# Altium PCB LXF1768.PcbDoc (part 4 of 5)
Units mil, origin at the board's own origin, x right, y up, seen from the top; angles counter-clockwise.
Board outline 3899 x 3079 mil, 2 copper layers (Top Layer, Bottom Layer); 52 components, 108 nets, 388 pads, 52 vias.
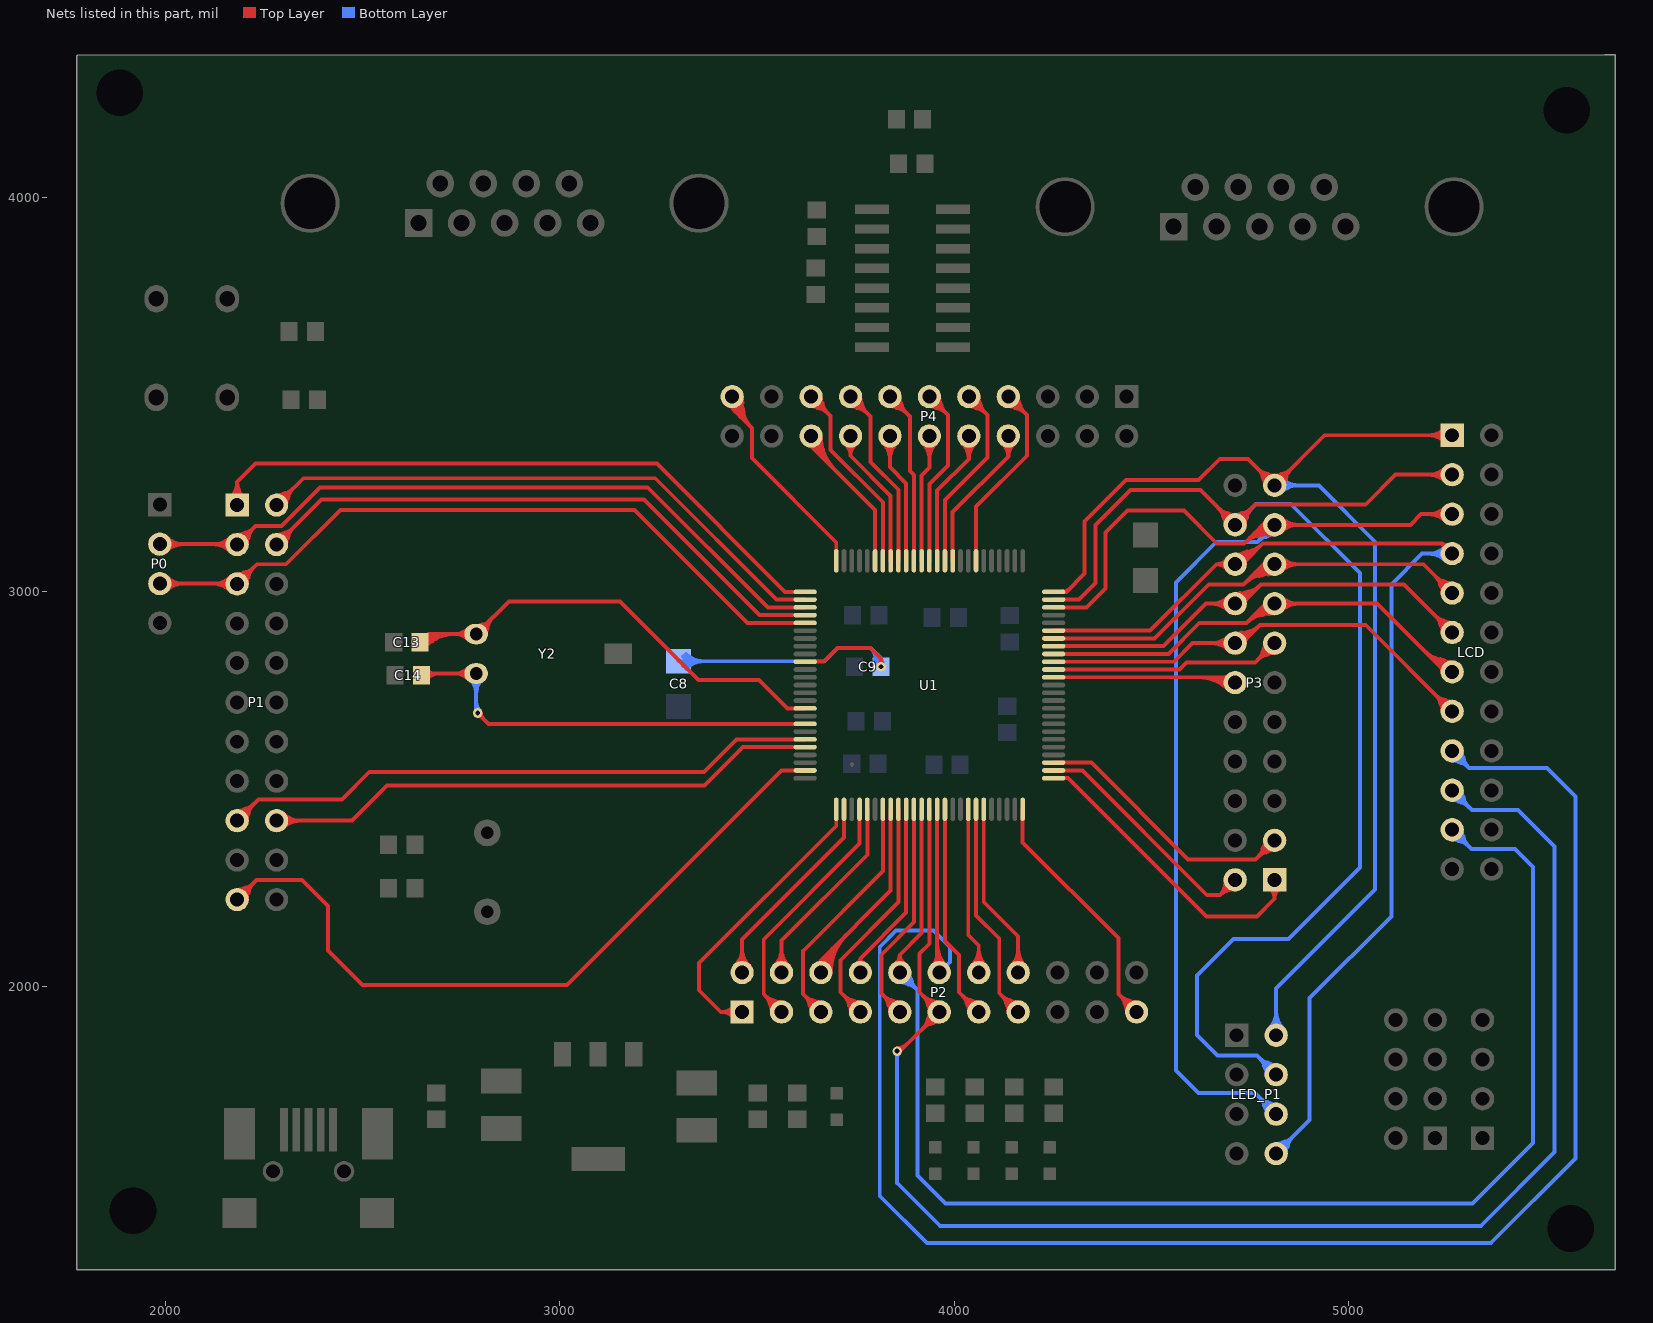
[diagram p4: the nets of this part, all layers, seen from the top]

## Via types
v1: diameter 25, hole 12, Top Layer to Bottom Layer, 27 vias
v2: diameter 24, hole 12, Top Layer to Bottom Layer, 25 vias

## Nets (pads, with @x,y where several pads share a name; then routed paths per layer and width w, separated by ;. In a path a pad name is that pad's centre, name@x,y a point inside that pad or via, vN(x,y) a via of type N, cw(c..) or ccw(c..) an arc to the next point about the centre after c; other vN are vias at no path point) (continued)
P0_28: P1.21 U1.24 | length 2243.4
  Top Layer w10: P1.21@2176.64,2221.1 cw(c2214.3,2213.39) 2204.35,2250.52 ; P1.21@2182,2220 2231,2269 2347,2269 2412,2204 2412,2091 2500,2003 3018,2003 3562.24,2547.24 U1.24@3622,2547.24 ; P1.21@2183.1,2214.64 ccw(c2175.39,2252.3) 2212.52,2242.35 ; 2206.8,2244.8 cw(c2182,2269.6) 2182,2234.53 ccw(c2182,2269.6) 2206.8,2244.8 ; 2206.8,2244.8 ccw(c2231.6,2220) 2196.53,2220 cw(c2231.6,2220) 2206.8,2244.8 ; 2223.87,2261.87 cw(c2182,2303.74) 2182,2244.53 ccw(c2182,2303.74) 2223.87,2261.87 ; 2223.87,2261.87 ccw(c2265.74,2220) 2206.53,2220 cw(c2265.74,2220) 2223.87,2261.87
P0_29: P2.3 U1.29 | length 1014.3
  Top Layer w10: 3531.48,1957.35 ccw(c3568.61,1967.3) P2.3@3560.9,1929.64 ; 3539.65,1965.52 cw(c3529.7,1928.39) P2.3@3567.36,1936.1 ; P2.3@3562,1935 3517,1980 3517,2119 3759.8,2361.8 U1.29@3759.8,2448.82 ; 3520.13,1976.87 cw(c3478.26,1935) 3537.47,1935 ccw(c3478.26,1935) 3520.13,1976.87 ; 3520.13,1976.87 ccw(c3562,2018.74) 3562,1959.53 cw(c3562,2018.74) 3520.13,1976.87 ; 3537.2,1959.8 cw(c3512.4,1935) 3547.47,1935 ccw(c3512.4,1935) 3537.2,1959.8 ; 3537.2,1959.8 ccw(c3562,1984.6) 3562,1949.53 cw(c3562,1984.6) 3537.2,1959.8
P0_30: P2.4 U1.30 | length 800.1
  Top Layer w10: P2.4@3562,2035 3562,2116 3779.48,2333.48 U1.30@3779.48,2448.82 ; 3562,2070.07 cw(c3526.93,2070.07) 3551.73,2045.27 ccw(c3526.93,2070.07) 3562,2070.07 ; 3562,2070.07 ccw(c3597.07,2070.07) 3572.27,2045.27 cw(c3597.07,2070.07) 3562,2070.07 ; 3562,2094.21 cw(c3502.79,2094.21) 3544.66,2052.34 ccw(c3502.79,2094.21) 3562,2094.21 ; 3562,2094.21 ccw(c3621.21,2094.21) 3579.34,2052.34 cw(c3621.21,2094.21) 3562,2094.21
P1_0: P4.18 U1.95 | length 1020
  Top Layer w10: P4.18@3631.54,3381.54 cw(c3609.98,3328.37) 3665.4,3343.22 ; P4.18@3634.4,3380.71 cw(c3631.08,3362.51) 3648.95,3367.3 ; P4.18@3635.3,3390.8 cw(c3619.44,3351.7) 3660.2,3362.62 ; P4.18@3637,3395 3637,3370 3799.16,3207.84 U1.95@3799.16,3078.74 ; P4.18@3631.53,3395 ccw(c3678.67,3395) 3645.34,3361.66 cw(c3678.67,3395) P4.18@3631.53,3395 ; P4.18@3641.53,3395 ccw(c3712.81,3395) 3662.41,3344.59 cw(c3712.81,3395) P4.18@3641.53,3395 ; P4.18@3651.53,3395 ccw(c3746.96,3395) 3679.48,3327.52 cw(c3746.96,3395) P4.18@3651.53,3395 ; P4.18@3661.53,3395 ccw(c3781.1,3395) 3696.55,3310.45 cw(c3781.1,3395) P4.18@3661.53,3395
P1_1: P4.17 U1.94 | length 872.9
  Top Layer w10: P4.17@3631.64,3493.9 ccw(c3669.3,3501.61) 3659.35,3464.48 ; P4.17@3637,3495 3686,3446 3686,3360 3818.85,3227.15 U1.94@3818.85,3078.74 ; P4.17@3638.1,3500.36 cw(c3630.39,3462.7) 3667.52,3472.65 ; 3661.8,3470.2 cw(c3686.6,3495) 3651.53,3495 ccw(c3686.6,3495) 3661.8,3470.2 ; 3661.8,3470.2 ccw(c3637,3445.4) 3637,3480.47 cw(c3637,3445.4) 3661.8,3470.2 ; 3678.87,3453.13 cw(c3720.74,3495) 3661.53,3495 ccw(c3720.74,3495) 3678.87,3453.13 ; 3678.87,3453.13 ccw(c3637,3411.26) 3637,3470.47 cw(c3637,3411.26) 3678.87,3453.13
P1_4: P4.16 U1.93 | length 583.1
  Top Layer w10: P4.16@3737,3395 3737,3345 ; U1.93@3838.53,3078.74 3838.53,3243.47 3737,3345 ; 3737,3345 cw(c3775.69,3345) 3752.01,3375.6 ccw(c3775.69,3345) 3737,3345 ; 3737,3345 ccw(c3698.31,3345) 3721.99,3375.6 cw(c3698.31,3345) 3737,3345 ; 3737,3365.39 cw(c3759.92,3365.39) 3745.89,3383.51 ccw(c3759.92,3365.39) 3737,3365.39 ; 3737,3365.39 ccw(c3714.08,3365.39) 3728.11,3383.51 cw(c3714.08,3365.39) 3737,3365.39
P1_8: P4.15 U1.92 | length 847.8
  Top Layer w10: P4.15@3731.64,3493.9 ccw(c3769.3,3501.61) 3759.35,3464.48 ; P4.15@3737,3495 3788,3444 3788,3329 3858.22,3258.78 U1.92@3858.22,3078.74 ; P4.15@3738.1,3500.36 cw(c3730.39,3462.7) 3767.52,3472.65 ; 3761.8,3470.2 cw(c3786.6,3495) 3751.53,3495 ccw(c3786.6,3495) 3761.8,3470.2 ; 3761.8,3470.2 ccw(c3737,3445.4) 3737,3480.47 cw(c3737,3445.4) 3761.8,3470.2 ; 3778.87,3453.13 cw(c3820.74,3495) 3761.53,3495 ccw(c3820.74,3495) 3778.87,3453.13 ; 3778.87,3453.13 ccw(c3737,3411.26) 3737,3470.47 cw(c3737,3411.26) 3778.87,3453.13
P1_9: P4.14 U1.91 | length 629.4
  Top Layer w10: P4.14@3837,3395 3837,3316 3877.91,3275.09 U1.91@3877.91,3078.74 ; 3837,3335.79 cw(c3896.21,3335.79) 3854.34,3377.66 ccw(c3896.21,3335.79) 3837,3335.79 ; 3837,3335.79 ccw(c3777.79,3335.79) 3819.66,3377.66 cw(c3777.79,3335.79) 3837,3335.79 ; 3837,3359.93 cw(c3872.07,3359.93) 3847.27,3384.73 ccw(c3872.07,3359.93) 3837,3359.93 ; 3837,3359.93 ccw(c3801.93,3359.93) 3826.73,3384.73 cw(c3801.93,3359.93) 3837,3359.93
P1_10: P4.13 U1.90 | length 822.7
  Top Layer w10: P4.13@3831.64,3493.9 ccw(c3869.3,3501.61) 3859.35,3464.48 ; P4.13@3837,3495 3888,3444 3888,3306 3897.59,3296.41 U1.90@3897.59,3078.74 ; P4.13@3838.1,3500.36 cw(c3830.39,3462.7) 3867.52,3472.65 ; 3861.8,3470.2 cw(c3886.6,3495) 3851.53,3495 ccw(c3886.6,3495) 3861.8,3470.2 ; 3861.8,3470.2 ccw(c3837,3445.4) 3837,3480.47 cw(c3837,3445.4) 3861.8,3470.2 ; 3878.87,3453.13 cw(c3920.74,3495) 3861.53,3495 ccw(c3920.74,3495) 3878.87,3453.13 ; 3878.87,3453.13 ccw(c3837,3411.26) 3837,3470.47 cw(c3837,3411.26) 3878.87,3453.13
P1_14: P4.12 U1.89 | length 620.6
  Top Layer w10: U1.89@3917.28,3078.74 3917.28,3295.28 3937,3315 P4.12@3937,3395 ; 3937,3335.79 cw(c3996.21,3335.79) 3954.34,3377.66 ccw(c3996.21,3335.79) 3937,3335.79 ; 3937,3335.79 ccw(c3877.79,3335.79) 3919.66,3377.66 cw(c3877.79,3335.79) 3937,3335.79 ; 3937,3359.93 cw(c3972.07,3359.93) 3947.27,3384.73 ccw(c3972.07,3359.93) 3937,3359.93 ; 3937,3359.93 ccw(c3901.93,3359.93) 3926.73,3384.73 cw(c3901.93,3359.93) 3937,3359.93
P1_15: P4.11 U1.88 | length 836.5
  Top Layer w10: P4.11@3931.64,3493.9 ccw(c3969.3,3501.61) 3959.35,3464.48 ; U1.88@3936.96,3078.74 3936.96,3272.96 3984,3320 3984,3448 P4.11@3937,3495 ; P4.11@3938.1,3500.36 cw(c3930.39,3462.7) 3967.52,3472.65 ; 3961.8,3470.2 cw(c3986.6,3495) 3951.53,3495 ccw(c3986.6,3495) 3961.8,3470.2 ; 3961.8,3470.2 ccw(c3937,3445.4) 3937,3480.47 cw(c3937,3445.4) 3961.8,3470.2 ; 3978.87,3453.13 cw(c4020.74,3495) 3961.53,3495 ccw(c4020.74,3495) 3978.87,3453.13 ; 3978.87,3453.13 ccw(c3937,3411.26) 3937,3470.47 cw(c3937,3411.26) 3978.87,3453.13
P1_16: P4.10 U1.87 | length 636.5
  Top Layer w10: U1.87@3956.64,3078.74 3956.64,3256.64 4037,3337 ; P4.10@4037,3395 4037,3337 ; 4037,3337 cw(c4093.31,3337) 4054.08,3377.4 ccw(c4093.31,3337) 4037,3337 ; 4037,3337 ccw(c3980.69,3337) 4019.92,3377.4 cw(c3980.69,3337) 4037,3337 ; 4037,3360.65 cw(c4070.35,3360.65) 4047.12,3384.58 ccw(c4070.35,3360.65) 4037,3360.65 ; 4037,3360.65 ccw(c4003.65,3360.65) 4026.88,3384.58 cw(c4003.65,3360.65) 4037,3360.65
P1_17: P4.9 U1.86 | length 861.6
  Top Layer w10: U1.86@3976.33,3078.74 3976.33,3233.33 4084,3341 4084,3448 P4.9@4037,3495 ; P4.9@4031.64,3493.9 ccw(c4069.3,3501.61) 4059.35,3464.48 ; P4.9@4038.1,3500.36 cw(c4030.39,3462.7) 4067.52,3472.65 ; 4061.8,3470.2 cw(c4086.6,3495) 4051.53,3495 ccw(c4086.6,3495) 4061.8,3470.2 ; 4061.8,3470.2 ccw(c4037,3445.4) 4037,3480.47 cw(c4037,3445.4) 4061.8,3470.2 ; 4078.87,3453.13 cw(c4120.74,3495) 4061.53,3495 ccw(c4120.74,3495) 4078.87,3453.13 ; 4078.87,3453.13 ccw(c4037,3411.26) 4037,3470.47 cw(c4037,3411.26) 4078.87,3453.13
P1_18: P2.5 U1.32 | length 998.2
  Top Layer w10: 3631.48,1957.35 ccw(c3668.61,1967.3) P2.5@3660.9,1929.64 ; 3639.65,1965.52 cw(c3629.7,1928.39) P2.5@3667.36,1936.1 ; P2.5@3662,1935 3616,1981 3616,2089 3818.85,2291.85 U1.32@3818.85,2448.82 ; 3620.13,1976.87 cw(c3578.26,1935) 3637.47,1935 ccw(c3578.26,1935) 3620.13,1976.87 ; 3620.13,1976.87 ccw(c3662,2018.74) 3662,1959.53 cw(c3662,2018.74) 3620.13,1976.87 ; 3637.2,1959.8 cw(c3612.4,1935) 3647.47,1935 ccw(c3612.4,1935) 3637.2,1959.8 ; 3637.2,1959.8 ccw(c3662,1984.6) 3662,1949.53 cw(c3662,1984.6) 3637.2,1959.8
P1_19: P2.6 U1.33 | length 1303.8
  Top Layer w10: P2.6@3655.59,2048.04 ccw(c3625.12,2110.02) 3691.84,2092.15 ; P2.6@3657.53,2048.82 ccw(c3649.26,2074.39) 3675.22,2067.44 ; P2.6@3660,2039.06 ccw(c3638.04,2083.76) 3686.14,2070.87 ; P2.6@3662,2035 3662,2066 ; 3678.82,2080.87 ccw(c3721.59,2069.41) P2.6@3683.24,2047.26 ; U1.33@3838.53,2448.82 3838.53,2242.53 3662,2066 ; 3662,2066 cw(c3654.67,2066) 3656.36,2058.87 ccw(c3654.67,2066) 3662,2066 ; 3662,2066 ccw(c3669.33,2066) 3667.64,2058.87 cw(c3669.33,2066) 3662,2066 ; P2.6@3656.53,2035 cw(c3718.16,2035) 3674.58,2078.58 ccw(c3718.16,2035) P2.6@3656.53,2035 ; P2.6@3666.53,2035 cw(c3752.3,2035) 3691.65,2095.65 ccw(c3752.3,2035) P2.6@3666.53,2035 ; P2.6@3676.53,2035 cw(c3786.44,2035) 3708.72,2112.72 ccw(c3786.44,2035) P2.6@3676.53,2035 ; P2.6@3686.53,2035 cw(c3820.58,2035) 3725.79,2129.79 ccw(c3820.58,2035) P2.6@3686.53,2035
P1_20: P2.7 U1.34 | length 977.2
  Top Layer w10: 3731.48,1957.35 ccw(c3768.61,1967.3) P2.7@3760.9,1929.64 ; 3739.65,1965.52 cw(c3729.7,1928.39) P2.7@3767.36,1936.1 ; P2.7@3762,1935 3711,1986 3711,2066 3858.22,2213.22 U1.34@3858.22,2448.82 ; 3720.13,1976.87 cw(c3678.26,1935) 3737.47,1935 ccw(c3678.26,1935) 3720.13,1976.87 ; 3720.13,1976.87 ccw(c3762,2018.74) 3762,1959.53 cw(c3762,2018.74) 3720.13,1976.87 ; 3737.2,1959.8 cw(c3712.4,1935) 3747.47,1935 ccw(c3712.4,1935) 3737.2,1959.8 ; 3737.2,1959.8 ccw(c3762,1984.6) 3762,1949.53 cw(c3762,1984.6) 3737.2,1959.8
P1_21: P2.8 U1.35 | length 529.5
  Top Layer w10: P2.8@3762,2035 3762,2071 ; U1.35@3877.91,2448.82 3877.91,2186.91 3762,2071 ; 3762,2071 cw(c3747.85,2071) 3753.03,2057.83 ccw(c3747.85,2071) 3762,2071 ; 3762,2071 ccw(c3776.15,2071) 3770.97,2057.83 cw(c3776.15,2071) 3762,2071
P1_22: P2.9 U1.36 | length 948.8
  Top Layer w10: 3831.48,1957.35 ccw(c3868.61,1967.3) P2.9@3860.9,1929.64 ; 3839.65,1965.52 cw(c3829.7,1928.39) P2.9@3867.36,1936.1 ; P2.9@3862,1935 3815,1982 3815,2080 3897.59,2162.59 U1.36@3897.59,2448.82 ; 3820.13,1976.87 cw(c3778.26,1935) 3837.47,1935 ccw(c3778.26,1935) 3820.13,1976.87 ; 3820.13,1976.87 ccw(c3862,2018.74) 3862,1959.53 cw(c3862,2018.74) 3820.13,1976.87 ; 3837.2,1959.8 cw(c3812.4,1935) 3847.47,1935 ccw(c3812.4,1935) 3837.2,1959.8 ; 3837.2,1959.8 ccw(c3862,1984.6) 3862,1949.53 cw(c3862,1984.6) 3837.2,1959.8
P1_23: LCD.21 P2.10 U1.37 | length 4444
  Top Layer w10: P2.10@3862,2035 3862,2080 ; U1.37@3917.28,2448.82 3917.28,2135.28 3862,2080 ; 3862,2080 cw(c3832.99,2080) 3848.71,2055.61 ccw(c3832.99,2080) 3862,2080 ; 3862,2080 ccw(c3891.01,2080) 3875.29,2055.61 cw(c3891.01,2080) 3862,2080
  Bottom Layer w10: P2.10@3856.64,2033.9 ccw(c3894.3,2041.61) 3884.35,2004.48 ; P2.10@3862,2035 3907,1990 3907,1521 3978,1450 5314,1450 5467,1603 5467,2302 5421,2348 5311,2348 LCD.21@5262,2397 ; P2.10@3863.1,2040.36 cw(c3855.39,2002.7) 3892.52,2012.65 ; LCD.21@5256.64,2395.9 ccw(c5294.3,2403.61) 5284.35,2366.48 ; LCD.21@5263.1,2402.36 cw(c5255.39,2364.7) 5292.52,2374.65 ; 3886.8,2010.2 cw(c3911.6,2035) 3876.53,2035 ccw(c3911.6,2035) 3886.8,2010.2 ; 3886.8,2010.2 ccw(c3862,1985.4) 3862,2020.47 cw(c3862,1985.4) 3886.8,2010.2 ; 3903.87,1993.13 cw(c3945.74,2035) 3886.53,2035 ccw(c3945.74,2035) 3903.87,1993.13 ; 3903.87,1993.13 ccw(c3862,1951.26) 3862,2010.47 cw(c3862,1951.26) 3903.87,1993.13 ; 5286.8,2372.2 cw(c5311.6,2397) 5276.53,2397 ccw(c5311.6,2397) 5286.8,2372.2 ; 5286.8,2372.2 ccw(c5262,2347.4) 5262,2382.47 cw(c5262,2347.4) 5286.8,2372.2 ; 5303.87,2355.13 cw(c5345.74,2397) 5286.53,2397 ccw(c5345.74,2397) 5303.87,2355.13 ; 5303.87,2355.13 ccw(c5262,2313.26) 5262,2372.47 cw(c5262,2313.26) 5303.87,2355.13
P1_24: LCD.19 P2.11 U1.38 | length 5163.6
  Top Layer w10: v2(3855,1836) 3863,1836 P2.11@3962,1935 3912,1985 3912,2083 3936.96,2107.96 U1.38@3936.96,2448.82 ; 3931.48,1912.65 cw(c3968.61,1902.7) P2.11@3960.9,1940.36 ; 3931.48,1957.35 ccw(c3968.61,1967.3) P2.11@3960.9,1929.64 ; 3939.65,1904.48 ccw(c3929.7,1941.61) P2.11@3967.36,1933.9 ; 3939.65,1965.52 cw(c3929.7,1928.39) P2.11@3967.36,1936.1 ; 3920.13,1893.13 cw(c3962,1851.26) 3962,1910.47 ccw(c3962,1851.26) 3920.13,1893.13 ; 3920.13,1893.13 ccw(c3878.26,1935) P2.11@3937.47,1935 ; 3920.13,1893.13 ccw(c3878.26,1935) P2.11@3937.47,1935 ; 3920.13,1976.87 cw(c3878.26,1935) P2.11@3937.47,1935 ; 3920.13,1976.87 ccw(c3962,2018.74) 3962,1959.53 cw(c3962,2018.74) 3920.13,1976.87 ; 3920.13,1976.87 cw(c3878.26,1935) P2.11@3937.47,1935 ; 3937.2,1910.2 cw(c3962,1885.4) 3962,1920.47 ccw(c3962,1885.4) 3937.2,1910.2 ; 3937.2,1910.2 ccw(c3912.4,1935) P2.11@3947.47,1935 ; 3937.2,1910.2 ccw(c3912.4,1935) P2.11@3947.47,1935 ; 3937.2,1959.8 cw(c3912.4,1935) P2.11@3947.47,1935 ; 3937.2,1959.8 ccw(c3962,1984.6) 3962,1949.53 cw(c3962,1984.6) 3937.2,1959.8 ; 3937.2,1959.8 cw(c3912.4,1935) P2.11@3947.47,1935 ; v2@3855,1843 ccw(c3855,1879.21) 3880.61,1853.61 cw(c3855,1879.21) v2@3855,1843
  Bottom Layer w10: v2(3855,1836) 3855,1502 3964,1393 5335,1393 5522,1580 5522,2354 5429,2447 5312,2447 LCD.19@5262,2497 ; LCD.19@5256.64,2495.9 ccw(c5294.3,2503.61) 5284.35,2466.48 ; LCD.19@5263.1,2502.36 cw(c5255.39,2464.7) 5292.52,2474.65 ; 3855,1819.1 cw(c3871.9,1819.1) 3859.95,1831.05 ccw(c3871.9,1819.1) 3855,1819.1 ; 3855,1819.1 ccw(c3838.1,1819.1) 3850.05,1831.05 cw(c3838.1,1819.1) 3855,1819.1 ; 5286.8,2472.2 cw(c5311.6,2497) 5276.53,2497 ccw(c5311.6,2497) 5286.8,2472.2 ; 5286.8,2472.2 ccw(c5262,2447.4) 5262,2482.47 cw(c5262,2447.4) 5286.8,2472.2 ; 5303.87,2455.13 cw(c5345.74,2497) 5286.53,2497 ccw(c5345.74,2497) 5303.87,2455.13 ; 5303.87,2455.13 ccw(c5262,2413.26) 5262,2472.47 cw(c5262,2413.26) 5303.87,2455.13
P1_25: LCD.17 P2.12 U1.39 | length 5166.6
  Top Layer w10: U1.39@3956.64,2448.82 3956.64,2040.36 P2.12@3962,2035 ; P2.12@3944.66,2052.34 ccw(c3915.71,2081.29) 3956.64,2081.29 cw(c3915.71,2081.29) P2.12@3944.66,2052.34 ; 3956.64,2083 ccw(c4010,2083) 3972.27,2045.27 cw(c4010,2083) 3956.64,2083 ; 3956.64,2107.14 ccw(c4034.14,2107.14) 3979.34,2052.34 cw(c4034.14,2107.14) 3956.64,2107.14
  Bottom Layer w10: P2.12@3962,2035 3989,2062 3989,2099 3947,2141 3852,2141 3811,2100 3811,1469 3931,1349 5360,1349 5575,1564 5575,2481 5502,2554 5305,2554 LCD.17@5262,2597 ; LCD.17@5256.64,2595.9 ccw(c5294.3,2603.61) 5284.35,2566.48 ; LCD.17@5263.1,2602.36 cw(c5255.39,2564.7) 5292.52,2574.65 ; 5286.8,2572.2 cw(c5311.6,2597) 5276.53,2597 ccw(c5311.6,2597) 5286.8,2572.2 ; 5286.8,2572.2 ccw(c5262,2547.4) 5262,2582.47 cw(c5262,2547.4) 5286.8,2572.2 ; 5303.87,2555.13 cw(c5345.74,2597) 5286.53,2597 ccw(c5345.74,2597) 5303.87,2555.13 ; 5303.87,2555.13 ccw(c5262,2513.26) 5262,2572.47 cw(c5262,2513.26) 5303.87,2555.13
P1_26: P2.13 U1.40 | length 930.6
  Top Layer w10: U1.40@3976.33,2448.82 3976.33,2114.67 4012,2079 4012,1985 P2.13@4062,1935 ; 4031.48,1957.35 ccw(c4068.61,1967.3) P2.13@4060.9,1929.64 ; 4039.65,1965.52 cw(c4029.7,1928.39) P2.13@4067.36,1936.1 ; 4020.13,1976.87 cw(c3978.26,1935) 4037.47,1935 ccw(c3978.26,1935) 4020.13,1976.87 ; 4020.13,1976.87 ccw(c4062,2018.74) 4062,1959.53 cw(c4062,2018.74) 4020.13,1976.87 ; 4037.2,1959.8 cw(c4012.4,1935) 4047.47,1935 ccw(c4012.4,1935) 4037.2,1959.8 ; 4037.2,1959.8 ccw(c4062,1984.6) 4062,1949.53 cw(c4062,1984.6) 4037.2,1959.8
P1_27: P2.14 U1.43 | length 721.1
  Top Layer w10: U1.43@4035.39,2448.82 4035.39,2129.61 4062,2103 P2.14@4062,2035 ; 4062,2070.07 cw(c4026.93,2070.07) 4051.73,2045.27 ccw(c4026.93,2070.07) 4062,2070.07 ; 4062,2070.07 ccw(c4097.07,2070.07) 4072.27,2045.27 cw(c4097.07,2070.07) 4062,2070.07 ; 4062,2094.21 cw(c4002.79,2094.21) 4044.66,2052.34 ccw(c4002.79,2094.21) 4062,2094.21 ; 4062,2094.21 ccw(c4121.21,2094.21) 4079.34,2052.34 cw(c4121.21,2094.21) 4062,2094.21
P1_28: P2.15 U1.44 | length 939.4
  Top Layer w10: U1.44@4055.07,2448.82 4055.07,2179.93 4114,2121 4114,1983 P2.15@4162,1935 ; 4131.48,1957.35 ccw(c4168.61,1967.3) P2.15@4160.9,1929.64 ; 4139.65,1965.52 cw(c4129.7,1928.39) P2.15@4167.36,1936.1 ; 4120.13,1976.87 cw(c4078.26,1935) 4137.47,1935 ccw(c4078.26,1935) 4120.13,1976.87 ; 4120.13,1976.87 ccw(c4162,2018.74) 4162,1959.53 cw(c4162,2018.74) 4120.13,1976.87 ; 4137.2,1959.8 cw(c4112.4,1935) 4147.47,1935 ccw(c4112.4,1935) 4137.2,1959.8 ; 4137.2,1959.8 ccw(c4162,1984.6) 4162,1949.53 cw(c4162,1984.6) 4137.2,1959.8
P1_29: P2.16 U1.45 | length 746.2
  Top Layer w10: U1.45@4074.76,2448.82 4074.76,2214.24 4162,2127 P2.16@4162,2035 ; 4162,2070.07 cw(c4126.93,2070.07) 4151.73,2045.27 ccw(c4126.93,2070.07) 4162,2070.07 ; 4162,2070.07 ccw(c4197.07,2070.07) 4172.27,2045.27 cw(c4197.07,2070.07) 4162,2070.07 ; 4162,2094.21 cw(c4102.79,2094.21) 4144.66,2052.34 ccw(c4102.79,2094.21) 4162,2094.21 ; 4162,2094.21 ccw(c4221.21,2094.21) 4179.34,2052.34 cw(c4221.21,2094.21) 4162,2094.21
P1_30: P1.18 U1.21 | length 1713.4
  Top Layer w10: P1.18@2282,2420 2473,2420 2562,2509 3367,2509 3464.3,2606.3 U1.21@3622,2606.3 ; 2317.07,2420 cw(c2317.07,2455.07) 2292.27,2430.27 ccw(c2317.07,2455.07) 2317.07,2420 ; 2317.07,2420 ccw(c2317.07,2384.93) 2292.27,2409.73 cw(c2317.07,2384.93) 2317.07,2420 ; 2341.21,2420 cw(c2341.21,2479.21) 2299.34,2437.34 ccw(c2341.21,2479.21) 2341.21,2420 ; 2341.21,2420 ccw(c2341.21,2360.79) 2299.34,2402.66 cw(c2341.21,2360.79) 2341.21,2420
P1_31: P1.17 U1.20 | length 1906.6
  Top Layer w10: P1.17@2176.64,2421.1 cw(c2214.3,2413.39) 2204.35,2450.52 ; P1.17@2182,2420 2236,2474 2448,2474 2517,2543 3365,2543 3447.99,2625.99 U1.20@3622,2625.99 ; P1.17@2183.1,2414.64 ccw(c2175.39,2452.3) 2212.52,2442.35 ; 2206.8,2444.8 cw(c2182,2469.6) 2182,2434.53 ccw(c2182,2469.6) 2206.8,2444.8 ; 2206.8,2444.8 ccw(c2231.6,2420) 2196.53,2420 cw(c2231.6,2420) 2206.8,2444.8 ; 2223.87,2461.87 cw(c2182,2503.74) 2182,2444.53 ccw(c2182,2503.74) 2223.87,2461.87 ; 2223.87,2461.87 ccw(c2265.74,2420) 2206.53,2420 cw(c2265.74,2420) 2223.87,2461.87
P2_0: LCD.1 LED_P1.2 P3.21 U1.75 | length 4663.3
  Top Layer w10: U1.75@4251.92,3000 4284,3000 4330,3046 4330,3178 4435,3283 4619,3283 4673,3337 4745,3337 P3.21@4812,3270 4939,3397 LCD.1@5262,3397 ; 4781.48,3292.35 ccw(c4818.61,3302.3) P3.21@4810.9,3264.64 ; 4789.65,3300.52 cw(c4779.7,3263.39) P3.21@4817.36,3271.1 ; P3.21@4806.64,3271.1 cw(c4844.3,3263.39) 4834.35,3300.52 ; P3.21@4813.1,3264.64 ccw(c4805.39,3302.3) 4842.52,3292.35 ; 4770.13,3311.87 cw(c4728.26,3270) 4787.47,3270 ccw(c4728.26,3270) 4770.13,3311.87 ; 4770.13,3311.87 ccw(c4812,3353.74) P3.21@4812,3294.53 ; 4770.13,3311.87 ccw(c4812,3353.74) P3.21@4812,3294.53 ; 4787.2,3294.8 cw(c4762.4,3270) 4797.47,3270 ccw(c4762.4,3270) 4787.2,3294.8 ; 4787.2,3294.8 ccw(c4812,3319.6) P3.21@4812,3284.53 ; 4787.2,3294.8 ccw(c4812,3319.6) P3.21@4812,3284.53 ; P3.21@4812,3284.53 ccw(c4812,3319.6) 4836.8,3294.8 ; P3.21@4812,3284.53 ccw(c4812,3319.6) 4836.8,3294.8 ; P3.21@4812,3294.53 ccw(c4812,3353.74) 4853.87,3311.87 ; P3.21@4812,3294.53 ccw(c4812,3353.74) 4853.87,3311.87 ; 4836.8,3294.8 ccw(c4861.6,3270) 4826.53,3270 cw(c4861.6,3270) 4836.8,3294.8 ; 4853.87,3311.87 ccw(c4895.74,3270) 4836.53,3270 cw(c4895.74,3270) 4853.87,3311.87 ; 5202.79,3397 cw(c5202.79,3337.79) 5244.66,3379.66 ccw(c5202.79,3337.79) 5202.79,3397 ; 5202.79,3397 ccw(c5202.79,3456.21) 5244.66,3414.34 cw(c5202.79,3456.21) 5202.79,3397 ; 5226.93,3397 cw(c5226.93,3361.93) 5251.73,3386.73 ccw(c5226.93,3361.93) 5226.93,3397 ; 5226.93,3397 ccw(c5226.93,3432.07) 5251.73,3407.27 cw(c5226.93,3432.07) 5226.93,3397 ; U1.75@4275.54,3000.91 ccw(c4275.54,3023.51) 4291.53,3007.53 cw(c4275.54,3023.51) U1.75@4275.54,3000.91
  Bottom Layer w10: P3.21@4812,3270 4924,3270 5067,3127 5067,2246 4816,1995 LED_P1.2@4816,1876 ; 4816,1911.07 cw(c4780.93,1911.07) 4805.73,1886.27 ccw(c4780.93,1911.07) 4816,1911.07 ; 4816,1911.07 ccw(c4851.07,1911.07) 4826.27,1886.27 cw(c4851.07,1911.07) 4816,1911.07 ; 4816,1935.21 cw(c4756.79,1935.21) 4798.66,1893.34 ccw(c4756.79,1935.21) 4816,1935.21 ; 4816,1935.21 ccw(c4875.21,1935.21) 4833.34,1893.34 cw(c4875.21,1935.21) 4816,1935.21 ; 4847.07,3270 cw(c4847.07,3305.07) 4822.27,3280.27 ccw(c4847.07,3305.07) 4847.07,3270 ; 4847.07,3270 ccw(c4847.07,3234.93) 4822.27,3259.73 cw(c4847.07,3234.93) 4847.07,3270 ; 4871.21,3270 cw(c4871.21,3329.21) 4829.34,3287.34 ccw(c4871.21,3329.21) 4871.21,3270 ; 4871.21,3270 ccw(c4871.21,3210.79) 4829.34,3252.66 cw(c4871.21,3210.79) 4871.21,3270
P2_1: LCD.3 LED_P1.4 P3.20 pad.EndPad@5262,3297 U1.74 | length 5198.5
  Top Layer w10: U1.74@4251.92,2980.32 4316.31,2980.32 4358,3022 4358,3169 4447,3258 4624,3258 P3.20@4712,3170 4763,3221 5043,3221 5119,3297 pad.EndPad@5262,3297 ; 4681.48,3192.35 ccw(c4718.61,3202.3) P3.20@4710.9,3164.64 ; 4689.65,3200.52 cw(c4679.7,3163.39) P3.20@4717.36,3171.1 ; P3.20@4706.64,3171.1 cw(c4744.3,3163.39) 4734.35,3200.52 ; P3.20@4713.1,3164.64 ccw(c4705.39,3202.3) 4742.52,3192.35 ; 4670.13,3211.87 cw(c4628.26,3170) 4687.47,3170 ccw(c4628.26,3170) 4670.13,3211.87 ; 4670.13,3211.87 ccw(c4712,3253.74) P3.20@4712,3194.53 ; 4670.13,3211.87 ccw(c4712,3253.74) P3.20@4712,3194.53 ; 4687.2,3194.8 cw(c4662.4,3170) 4697.47,3170 ccw(c4662.4,3170) 4687.2,3194.8 ; 4687.2,3194.8 ccw(c4712,3219.6) P3.20@4712,3184.53 ; 4687.2,3194.8 ccw(c4712,3219.6) P3.20@4712,3184.53 ; P3.20@4712,3184.53 ccw(c4712,3219.6) 4736.8,3194.8 ; P3.20@4712,3184.53 ccw(c4712,3219.6) 4736.8,3194.8 ; P3.20@4712,3194.53 ccw(c4712,3253.74) 4753.87,3211.87 ; P3.20@4712,3194.53 ccw(c4712,3253.74) 4753.87,3211.87 ; 4736.8,3194.8 ccw(c4761.6,3170) 4726.53,3170 cw(c4761.6,3170) 4736.8,3194.8 ; 4753.87,3211.87 ccw(c4795.74,3170) 4736.53,3170 cw(c4795.74,3170) 4753.87,3211.87 ; 5202.79,3297 cw(c5202.79,3237.79) 5244.66,3279.66 ccw(c5202.79,3237.79) 5202.79,3297 ; 5202.79,3297 ccw(c5202.79,3356.21) 5244.66,3314.34 cw(c5202.79,3356.21) 5202.79,3297 ; 5226.93,3297 cw(c5226.93,3261.93) 5251.73,3286.73 ccw(c5226.93,3261.93) 5226.93,3297 ; 5226.93,3297 ccw(c5226.93,3332.07) 5251.73,3307.27 cw(c5226.93,3332.07) 5226.93,3297
  Bottom Layer w10: P3.20@4706.64,3171.1 cw(c4744.3,3163.39) 4734.35,3200.52 ; P3.20@4712,3170 4765,3223 4853,3223 5028,3048 5028,2301 4847,2120 4708,2120 4615,2027 4615,1877 4667,1825 4767,1825 LED_P1.4@4816,1776 ; P3.20@4713.1,3164.64 ccw(c4705.39,3202.3) 4742.52,3192.35 ; 4785.48,1798.35 ccw(c4822.61,1808.3) LED_P1.4@4814.9,1770.64 ; 4793.65,1806.52 cw(c4783.7,1769.39) LED_P1.4@4821.36,1777.1 ; 4736.8,3194.8 cw(c4712,3219.6) 4712,3184.53 ccw(c4712,3219.6) 4736.8,3194.8 ; 4736.8,3194.8 ccw(c4761.6,3170) 4726.53,3170 cw(c4761.6,3170) 4736.8,3194.8 ; 4753.87,3211.87 cw(c4712,3253.74) 4712,3194.53 ccw(c4712,3253.74) 4753.87,3211.87 ; 4753.87,3211.87 ccw(c4795.74,3170) 4736.53,3170 cw(c4795.74,3170) 4753.87,3211.87 ; 4774.13,1817.87 cw(c4732.26,1776) 4791.47,1776 ccw(c4732.26,1776) 4774.13,1817.87 ; 4774.13,1817.87 ccw(c4816,1859.74) 4816,1800.53 cw(c4816,1859.74) 4774.13,1817.87 ; 4791.2,1800.8 cw(c4766.4,1776) 4801.47,1776 ccw(c4766.4,1776) 4791.2,1800.8 ; 4791.2,1800.8 ccw(c4816,1825.6) 4816,1790.53 cw(c4816,1825.6) 4791.2,1800.8
P2_2: LCD.5 LED_P1.6 P3.19 U1.73 | length 5143.4
  Top Layer w10: U1.73@4251.92,2960.63 4335.63,2960.63 4383,3008 4383,3150 4439,3206 4582,3206 4666,3122 4734,3122 ; 4768.79,3151.63 ccw(c4763,3210.18) P3.19@4808.5,3172.87 ; 4770.56,3142.1 ccw(c4763.9,3209.44) P3.19@4816.23,3166.53 ; 4778.16,3162.26 ccw(c4775.57,3188.43) P3.19@4799.04,3176.56 ; 4794.58,3144.47 ccw(c4790.3,3187.79) P3.19@4823.96,3160.19 ; LCD.5@5262,3197 5183,3197 5156,3170 P3.19@4812,3170 4782,3170 ; 4734,3122 cw(c4794.18,3061.82) 4808.01,3145.8 ccw(c4794.18,3061.82) 4734,3122 ; 4734,3122 4782,3170 ; 4782,3170 cw(c4782,3163.92) 4787.96,3165.13 ccw(c4782,3163.92) 4782,3170 ; 4782,3170 ccw(c4782,3176.08) 4787.96,3174.87 cw(c4782,3176.08) 4782,3170 ; 4847.07,3170 cw(c4847.07,3205.07) 4822.27,3180.27 ccw(c4847.07,3205.07) 4847.07,3170 ; 4847.07,3170 ccw(c4847.07,3134.93) 4822.27,3159.73 cw(c4847.07,3134.93) 4847.07,3170 ; 4871.21,3170 cw(c4871.21,3229.21) 4829.34,3187.34 ccw(c4871.21,3229.21) 4871.21,3170 ; 4871.21,3170 ccw(c4871.21,3110.79) 4829.34,3152.66 cw(c4871.21,3110.79) 4871.21,3170 ; 5202.79,3197 cw(c5202.79,3137.79) 5244.66,3179.66 ccw(c5202.79,3137.79) 5202.79,3197 ; 5202.79,3197 ccw(c5202.79,3256.21) 5244.66,3214.34 cw(c5202.79,3256.21) 5202.79,3197 ; 5226.93,3197 cw(c5226.93,3161.93) 5251.73,3186.73 ccw(c5226.93,3161.93) 5226.93,3197 ; 5226.93,3197 ccw(c5226.93,3232.07) 5251.73,3207.27 cw(c5226.93,3232.07) 5226.93,3197 ; 4747.78,3135.78 cw(c4798.08,3085.47) 4809.64,3155.67 ccw(c4798.08,3085.47) 4747.78,3135.78 ; 4761.55,3149.55 cw(c4801.97,3109.12) 4811.26,3165.53 ccw(c4801.97,3109.12) 4761.55,3149.55 ; 4775.32,3163.32 cw(c4805.87,3132.77) 4812.89,3175.4 ccw(c4805.87,3132.77) 4775.32,3163.32
  Bottom Layer w10: 4781.48,3147.65 cw(c4818.61,3137.7) P3.19@4810.9,3175.36 ; 4785.48,1698.35 ccw(c4822.61,1708.3) LED_P1.6@4814.9,1670.64 ; 4789.65,3139.48 ccw(c4779.7,3176.61) P3.19@4817.36,3168.9 ; 4793.65,1706.52 cw(c4783.7,1669.39) LED_P1.6@4821.36,1677.1 ; P3.19@4812,3170 4768,3126 4664,3126 4562,3024 4562,1787 4619,1730 4762,1730 LED_P1.6@4816,1676 ; 4770.13,3128.13 cw(c4812,3086.26) 4812,3145.47 ccw(c4812,3086.26) 4770.13,3128.13 ; 4770.13,3128.13 ccw(c4728.26,3170) 4787.47,3170 cw(c4728.26,3170) 4770.13,3128.13 ; 4774.13,1717.87 cw(c4732.26,1676) 4791.47,1676 ccw(c4732.26,1676) 4774.13,1717.87 ; 4774.13,1717.87 ccw(c4816,1759.74) 4816,1700.53 cw(c4816,1759.74) 4774.13,1717.87 ; 4787.2,3145.2 cw(c4812,3120.4) 4812,3155.47 ccw(c4812,3120.4) 4787.2,3145.2 ; 4787.2,3145.2 ccw(c4762.4,3170) 4797.47,3170 cw(c4762.4,3170) 4787.2,3145.2 ; 4791.2,1700.8 cw(c4766.4,1676) 4801.47,1676 ccw(c4766.4,1676) 4791.2,1700.8 ; 4791.2,1700.8 ccw(c4816,1725.6) 4816,1690.53 cw(c4816,1725.6) 4791.2,1700.8
P2_3: LCD.7 LED_P1.8 P3.18 pad.EndPad@5262,3097 U1.70 | length 4261.2
  Top Layer w10: U1.70@4251.92,2901.57 4496.57,2901.57 4665,3070 ; P3.18@4707,3072.22 cw(c4755.9,3050.51) 4742.57,3102.33 ; P3.18@4712,3070 4665,3070 ; P3.18@4712,3080 4738.97,3080 4781.97,3123 ; P3.18@4716.14,3068.16 cw(c4780,3039.81) 4762.59,3107.48 ; P3.18@4716.35,3068.75 cw(c4748.22,3059.56) 4739.96,3091.68 ; pad.EndPad@5262,3097 5236,3123 ; 4665,3070 cw(c4665,3037.24) 4691.88,3055.97 ccw(c4665,3037.24) 4665,3070 ; 4665,3070 ccw(c4665,3102.76) 4691.88,3084.03 cw(c4665,3102.76) 4665,3070 ; 4781.97,3123 cw(c4713.22,3191.74) 4712.25,3094.53 ccw(c4713.22,3191.74) 4781.97,3123 ; 4781.97,3123 5236,3123 ; 5236,3123 cw(c5225.19,3112.18) 5239.33,3106.35 ccw(c5225.19,3112.18) 5236,3123 ; 5236,3123 ccw(c5246.82,3133.81) 5252.65,3119.67 cw(c5246.82,3133.81) 5236,3123 ; P3.18@4712.05,3074.53 ccw(c4712.55,3125.08) 4748.3,3089.33 cw(c4712.55,3125.08) P3.18@4712.05,3074.53 ; P3.18@4712.15,3084.53 ccw(c4712.89,3158.41) 4765.14,3106.16 cw(c4712.89,3158.41) P3.18@4712.15,3084.53 ; P3.18@4736.53,3070 cw(c4754.77,3070) 4741.87,3082.9 ccw(c4754.77,3070) P3.18@4736.53,3070
  Bottom Layer w10: LED_P1.8@4810.64,1577.1 cw(c4848.3,1569.39) 4838.35,1606.52 ; LED_P1.8@4816,1576 4901,1661 4901,1970 5108,2177 5108,3019 5186,3097 LCD.7@5262,3097 ; LED_P1.8@4817.1,1570.64 ccw(c4809.39,1608.3) 4846.52,1598.35 ; 4840.8,1600.8 cw(c4816,1625.6) 4816,1590.53 ccw(c4816,1625.6) 4840.8,1600.8 ; 4840.8,1600.8 ccw(c4865.6,1576) 4830.53,1576 cw(c4865.6,1576) 4840.8,1600.8 ; 4857.87,1617.87 cw(c4816,1659.74) 4816,1600.53 ccw(c4816,1659.74) 4857.87,1617.87 ; 4857.87,1617.87 ccw(c4899.74,1576) 4840.53,1576 cw(c4899.74,1576) 4857.87,1617.87 ; 5202.79,3097 cw(c5202.79,3037.79) 5244.66,3079.66 ccw(c5202.79,3037.79) 5202.79,3097 ; 5202.79,3097 ccw(c5202.79,3156.21) 5244.66,3114.34 cw(c5202.79,3156.21) 5202.79,3097 ; 5226.93,3097 cw(c5226.93,3061.93) 5251.73,3086.73 ccw(c5226.93,3061.93) 5226.93,3097 ; 5226.93,3097 ccw(c5226.93,3132.07) 5251.73,3107.27 cw(c5226.93,3132.07) 5226.93,3097
P2_4: LCD.9 P3.17 U1.69 | length 2439.3
  Top Layer w10: U1.69@4251.92,2881.89 4507.89,2881.89 4645,3019 4733,3019 ; 4771.63,3049.77 ccw(c4763.59,3103.55) P3.17@4808.28,3072.58 ; 4772.01,3040.06 ccw(c4761.99,3106.99) P3.17@4816.4,3066.75 ; 4782.58,3061.18 ccw(c4779.72,3080.33) P3.17@4798.16,3074.43 ; 4795.88,3043.63 ccw(c4789.44,3086.69) P3.17@4824.44,3060.8 ; 5231.48,3019.35 ccw(c5268.61,3029.3) LCD.9@5260.9,2991.64 ; 5239.65,3027.52 cw(c5229.7,2990.39) LCD.9@5267.36,2998.1 ; LCD.9@5262,2997 5189,3070 P3.17@4812,3070 4784,3070 4733,3019 ; 4733,3019 cw(c4798.72,2953.28) 4809.23,3045.63 ccw(c4798.72,2953.28) 4733,3019 ; 4847.07,3070 cw(c4847.07,3105.07) 4822.27,3080.27 ccw(c4847.07,3105.07) 4847.07,3070 ; 4847.07,3070 ccw(c4847.07,3034.93) 4822.27,3059.73 cw(c4847.07,3034.93) 4847.07,3070 ; 4871.21,3070 cw(c4871.21,3129.21) 4829.34,3087.34 ccw(c4871.21,3129.21) 4871.21,3070 ; 4871.21,3070 ccw(c4871.21,3010.79) 4829.34,3052.66 cw(c4871.21,3010.79) 4871.21,3070 ; 5220.13,3038.87 cw(c5178.26,2997) 5237.47,2997 ccw(c5178.26,2997) 5220.13,3038.87 ; 5220.13,3038.87 ccw(c5262,3080.74) 5262,3021.53 cw(c5262,3080.74) 5220.13,3038.87 ; 5237.2,3021.8 cw(c5212.4,2997) 5247.47,2997 ccw(c5212.4,2997) 5237.2,3021.8 ; 5237.2,3021.8 ccw(c5262,3046.6) 5262,3011.53 cw(c5262,3046.6) 5237.2,3021.8 ; 4747.67,3033.67 cw(c4801.72,2979.62) 4810.36,3055.57 ccw(c4801.72,2979.62) 4747.67,3033.67 ; 4762.33,3048.33 cw(c4804.71,3005.95) 4811.49,3065.5 ccw(c4804.71,3005.95) 4762.33,3048.33 ; 4776.99,3062.99 cw(c4807.71,3032.28) 4812.62,3075.44 ccw(c4807.71,3032.28) 4776.99,3062.99
P2_5: LCD.11 P3.16 pad.EndPad@5262,2897 U1.68 | length 2277.2
  Top Layer w10: U1.68@4251.92,2862.2 4530.2,2862.2 4638,2970 P3.16@4712,2970 4728.97,2970 4777.97,3019 ; P3.16@4698.48,2977.53 cw(c4732.66,2958.49) 4724.79,2996.81 ; P3.16@4707.22,2972.66 cw(c4757.81,2944.48) 4746.15,3001.2 ; P3.16@4716.24,2968.41 cw(c4749.18,2956.05) 4742.1,2990.51 ; 5231.48,2919.35 ccw(c5268.61,2929.3) LCD.11@5260.9,2891.64 ; 5239.65,2927.52 cw(c5229.7,2890.39) LCD.11@5267.36,2898.1 ; pad.EndPad@5262,2897 5140,3019 4891,3019 4825,3019 4777.97,3019 ; 4652.79,2970 cw(c4652.79,2910.79) 4694.66,2952.66 ccw(c4652.79,2910.79) 4652.79,2970 ; 4652.79,2970 ccw(c4652.79,3029.21) 4694.66,2987.34 cw(c4652.79,3029.21) 4652.79,2970 ; 4676.93,2970 cw(c4676.93,2934.93) 4701.73,2959.73 ccw(c4676.93,2934.93) 4676.93,2970 ; 4676.93,2970 ccw(c4676.93,3005.07) 4701.73,2980.27 cw(c4676.93,3005.07) 4676.93,2970 ; 4777.97,3019 cw(c4718.43,3078.53) 4713.45,2994.48 ccw(c4718.43,3078.53) 4777.97,3019 ; 5220.13,2938.87 cw(c5178.26,2897) 5237.47,2897 ccw(c5178.26,2897) 5220.13,2938.87 ; 5220.13,2938.87 ccw(c5262,2980.74) 5262,2921.53 cw(c5262,2980.74) 5220.13,2938.87 ; 5237.2,2921.8 cw(c5212.4,2897) 5247.47,2897 ccw(c5212.4,2897) 5237.2,2921.8 ; 5237.2,2921.8 ccw(c5262,2946.6) 5262,2911.53 cw(c5262,2946.6) 5237.2,2921.8 ; P3.16@4712.27,2974.52 ccw(c4714.91,3019.11) 4746.49,2987.52 cw(c4714.91,3019.11) P3.16@4712.27,2974.52 ; P3.16@4712.86,2984.5 ccw(c4716.67,3048.82) 4762.23,3003.26 cw(c4716.67,3048.82) P3.16@4712.86,2984.5 ; P3.16@4736.53,2970 cw(c4754.77,2970) 4741.87,2982.9 ccw(c4754.77,2970) P3.16@4736.53,2970
P2_6: LCD.13 P3.15 U1.67 | length 2450.4
  Top Layer w10: U1.67@4251.92,2842.52 4542.52,2842.52 4621,2921 4741,2921 ; 4772.49,2939.42 ccw(c4761.41,3006.19) P3.15@4816.45,2966.82 ; 4776.31,2949.85 ccw(c4768.99,2993.95) P3.15@4808.04,2972.2 ; 4796.31,2943.38 ccw(c4789.18,2986.33) P3.15@4824.58,2961 ; 5212.01,2834.92 cw(c5194.05,2767.9) LCD.13@5257.84,2795.22 ; 5231.9,2829.59 cw(c5218.13,2778.21) LCD.13@5267.03,2799.15 ; 5234.27,2818.96 cw(c5225.69,2786.93) LCD.13@5257.64,2795.79 ; LCD.13@5262,2797 5245,2797 5072,2970 P3.15@4812,2970 4790,2970 4741,2921 ; 4741,2921 cw(c4801.33,2860.68) 4809.62,2945.59 ccw(c4801.33,2860.68) 4741,2921 ; 4847.07,2970 cw(c4847.07,3005.07) 4822.27,2980.27 ccw(c4847.07,3005.07) 4847.07,2970 ; 4847.07,2970 ccw(c4847.07,2934.93) 4822.27,2959.73 cw(c4847.07,2934.93) 4847.07,2970 ; 4871.21,2970 cw(c4871.21,3029.21) 4829.34,2987.34 ccw(c4871.21,3029.21) 4871.21,2970 ; 4871.21,2970 ccw(c4871.21,2910.79) 4829.34,2952.66 cw(c4871.21,2910.79) 4871.21,2970 ; 4755.97,2935.97 cw(c4803.99,2887.95) 4810.59,2955.54 ccw(c4803.99,2887.95) 4755.97,2935.97 ; 4770.94,2950.94 cw(c4806.65,2915.22) 4811.56,2965.49 ccw(c4806.65,2915.22) 4770.94,2950.94 ; 5191.11,2850.89 ccw(c5262,2921.78) 5262,2821.53 cw(c5262,2921.78) 5191.11,2850.89 ; 5208.18,2833.82 ccw(c5262,2887.64) 5262,2811.53 cw(c5262,2887.64) 5208.18,2833.82 ; 5225.25,2816.75 ccw(c5262,2853.5) 5262,2801.53 cw(c5262,2853.5) 5225.25,2816.75 ; 5232.15,2809.85 cw(c5219.3,2797) 5237.47,2797 ccw(c5219.3,2797) 5232.15,2809.85
P2_7: LCD.15 P3.14 pad.EndPad@5262,2697 U1.66 | length 2277.6
  Top Layer w10: U1.66@4251.92,2822.84 4556.84,2822.84 4604,2870 P3.14@4712,2870 4728.97,2870 4774.97,2916 ; P3.14@4699.41,2878.99 cw(c4734.64,2853.84) 4727.66,2896.56 ; P3.14@4707.55,2873.18 cw(c4762.18,2834.19) 4751.37,2900.43 ; P3.14@4716.05,2867.97 cw(c4752.09,2849.91) 4745.6,2889.7 ; 5231.48,2719.35 ccw(c5268.61,2729.3) LCD.15@5260.9,2691.64 ; 5239.65,2727.52 cw(c5229.7,2690.39) LCD.15@5267.36,2698.1 ; pad.EndPad@5262,2697 5043,2916 4888,2916 4869,2916 4774.97,2916 ; 4652.79,2870 cw(c4652.79,2810.79) 4694.66,2852.66 ccw(c4652.79,2810.79) 4652.79,2870 ; 4652.79,2870 ccw(c4652.79,2929.21) 4694.66,2887.34 cw(c4652.79,2929.21) 4652.79,2870 ; 4676.93,2870 cw(c4676.93,2834.93) 4701.73,2859.73 ccw(c4676.93,2834.93) 4676.93,2870 ; 4676.93,2870 ccw(c4676.93,2905.07) 4701.73,2880.27 cw(c4676.93,2905.07) 4676.93,2870 ; 4774.97,2916 cw(c4721.94,2969.03) 4714.45,2894.41 ccw(c4721.94,2969.03) 4774.97,2916 ; 5220.13,2738.87 cw(c5178.26,2697) 5237.47,2697 ccw(c5178.26,2697) 5220.13,2738.87 ; 5220.13,2738.87 ccw(c5262,2780.74) 5262,2721.53 cw(c5262,2780.74) 5220.13,2738.87 ; 5237.2,2721.8 cw(c5212.4,2697) 5247.47,2697 ccw(c5212.4,2697) 5237.2,2721.8 ; 5237.2,2721.8 ccw(c5262,2746.6) 5262,2711.53 cw(c5262,2746.6) 5237.2,2721.8 ; P3.14@4712.45,2874.5 ccw(c4716.5,2914.81) 4745.14,2886.17 cw(c4716.5,2914.81) P3.14@4712.45,2874.5 ; P3.14@4713.45,2884.45 ccw(c4719.22,2941.92) 4760.05,2901.08 cw(c4719.22,2941.92) P3.14@4713.45,2884.45 ; P3.14@4736.53,2870 cw(c4754.77,2870) 4741.87,2882.9 ccw(c4754.77,2870) P3.14@4736.53,2870
P2_8: P3.13 U1.65 | length 969.1
  Top Layer w10: U1.65@4251.92,2803.15 4571.15,2803.15 4589,2821 4763,2821 P3.13@4812,2870 ; 4781.48,2847.65 cw(c4818.61,2837.7) P3.13@4810.9,2875.36 ; 4789.65,2839.48 ccw(c4779.7,2876.61) P3.13@4817.36,2868.9 ; 4770.13,2828.13 cw(c4812,2786.26) 4812,2845.47 ccw(c4812,2786.26) 4770.13,2828.13 ; 4770.13,2828.13 ccw(c4728.26,2870) 4787.47,2870 cw(c4728.26,2870) 4770.13,2828.13 ; 4787.2,2845.2 cw(c4812,2820.4) 4812,2855.47 ccw(c4812,2820.4) 4787.2,2845.2 ; 4787.2,2845.2 ccw(c4762.4,2870) 4797.47,2870 cw(c4762.4,2870) 4787.2,2845.2
P2_9: P3.12 U1.64 | length 868.4
  Top Layer w10: U1.64@4251.92,2783.47 4698.53,2783.47 P3.12@4712,2770 ; 4620.28,2783.46 cw(c4620.28,2678.28) 4694.66,2752.66 ccw(c4620.28,2678.28) 4620.28,2783.46 ; 4644.42,2783.46 cw(c4644.42,2702.42) 4701.73,2759.73 ccw(c4644.42,2702.42) 4644.42,2783.46 ; 4668.56,2783.47 cw(c4668.56,2726.56) 4708.8,2766.8 ccw(c4668.56,2726.56) 4668.56,2783.47 ; 4685.29,2783.46 ccw(c4685.29,2796.71) 4694.66,2787.34 cw(c4685.29,2796.71) 4685.29,2783.46
P2_10: P3.3 U1.53 | length 1062.7
  Top Layer w10: U1.53@4251.92,2566.93 4348.07,2566.93 4593,2322 4764,2322 P3.3@4812,2370 ; 4781.48,2347.65 cw(c4818.61,2337.7) P3.3@4810.9,2375.36 ; 4789.65,2339.48 ccw(c4779.7,2376.61) P3.3@4817.36,2368.9 ; 4770.13,2328.13 cw(c4812,2286.26) 4812,2345.47 ccw(c4812,2286.26) 4770.13,2328.13 ; 4770.13,2328.13 ccw(c4728.26,2370) 4787.47,2370 cw(c4728.26,2370) 4770.13,2328.13 ; 4787.2,2345.2 cw(c4812,2320.4) 4812,2355.47 ccw(c4812,2320.4) 4787.2,2345.2 ; 4787.2,2345.2 ccw(c4762.4,2370) 4797.47,2370 cw(c4762.4,2370) 4787.2,2345.2
P2_11: P3.2 U1.52 | length 951.5
  Top Layer w10: U1.52@4251.92,2547.24 4324.76,2547.24 4640,2232 4674,2232 ; 4682.32,2241.29 cw(c4727.46,2232.57) P3.2@4709.91,2275.06 ; 4683.29,2240.32 ccw(c4674.57,2285.46) P3.2@4717.06,2267.91 ; P3.2@4712,2270 4674,2232 ; 4674,2232 cw(c4706.96,2199.05) 4710.26,2245.53 ccw(c4706.96,2199.05) 4674,2232 ; 4674,2232 ccw(c4641.05,2264.96) 4687.53,2268.26 cw(c4641.05,2264.96) 4674,2232 ; 4689.49,2247.49 cw(c4709.01,2227.98) 4710.97,2255.51 ccw(c4709.01,2227.98) 4689.49,2247.49 ; 4689.49,2247.49 ccw(c4669.98,2267.01) 4697.51,2268.97 cw(c4669.98,2267.01) 4689.49,2247.49
P2_12: P3.1 U1.51 | length 903.1
  Top Layer w10: U1.51@4251.92,2527.56 4288.44,2527.56 4639,2177 4767,2177 4812,2222 ; P3.1@4812,2270 4812,2222 ; 4812,2222 cw(c4846.7,2222) 4826.37,2250.12 ccw(c4846.7,2222) 4812,2222 ; 4812,2222 ccw(c4777.3,2222) 4797.63,2250.12 cw(c4777.3,2222) 4812,2222
P2_13: P2.21 U1.50 | length 1014.8
  Top Layer w10: U1.50@4173.18,2448.82 4173.18,2364.82 4416,2122 4416,1981 P2.21@4462,1935 ; 4431.48,1957.35 ccw(c4468.61,1967.3) P2.21@4460.9,1929.64 ; 4439.65,1965.52 cw(c4429.7,1928.39) P2.21@4467.36,1936.1 ; 4420.13,1976.87 cw(c4378.26,1935) 4437.47,1935 ccw(c4378.26,1935) 4420.13,1976.87 ; 4420.13,1976.87 ccw(c4462,2018.74) 4462,1959.53 cw(c4462,2018.74) 4420.13,1976.87 ; 4437.2,1959.8 cw(c4412.4,1935) 4447.47,1935 ccw(c4412.4,1935) 4437.2,1959.8 ; 4437.2,1959.8 ccw(c4462,1984.6) 4462,1949.53 cw(c4462,1984.6) 4437.2,1959.8
P3_25: P2.2 U1.27 | length 817.1
  Top Layer w10: P2.2@3462,2035 3462,2119 3720.43,2377.43 U1.27@3720.43,2448.82 ; 3462,2070.07 cw(c3426.93,2070.07) 3451.73,2045.27 ccw(c3426.93,2070.07) 3462,2070.07 ; 3462,2070.07 ccw(c3497.07,2070.07) 3472.27,2045.27 cw(c3497.07,2070.07) 3462,2070.07 ; 3462,2094.21 cw(c3402.79,2094.21) 3444.66,2052.34 ccw(c3402.79,2094.21) 3462,2094.21 ; 3462,2094.21 ccw(c3521.21,2094.21) 3479.34,2052.34 cw(c3521.21,2094.21) 3462,2094.21
P3_26: P2.1 U1.26 | length 990.9
  Top Layer w10: P2.1@3462,1935 3408,1935 ; U1.26@3700.74,2448.82 3700.74,2406.74 3353,2059 3353,1990 3408,1935 ; 3408,1935 cw(c3408,1887.82) 3443.53,1918.86 ccw(c3408,1887.82) 3408,1935 ; 3408,1935 ccw(c3408,1982.18) 3443.53,1951.14 cw(c3408,1982.18) 3408,1935 ; 3430.02,1935 cw(c3430.02,1907.06) 3451.06,1925.44 ccw(c3430.02,1907.06) 3430.02,1935 ; 3430.02,1935 ccw(c3430.02,1962.94) 3451.06,1944.56 cw(c3430.02,1962.94) 3430.02,1935
P4_28: P4.7 U1.82 | length 870.4
  Top Layer w10: U1.82@4055.07,3078.74 4055.07,3216.07 4184,3345 4184,3448 P4.7@4137,3495 ; P4.7@4131.64,3493.9 ccw(c4169.3,3501.61) 4159.35,3464.48 ; P4.7@4138.1,3500.36 cw(c4130.39,3462.7) 4167.52,3472.65 ; 4161.8,3470.2 cw(c4186.6,3495) 4151.53,3495 ccw(c4186.6,3495) 4161.8,3470.2 ; 4161.8,3470.2 ccw(c4137,3445.4) 4137,3480.47 cw(c4137,3445.4) 4161.8,3470.2 ; 4178.87,3453.13 cw(c4220.74,3495) 4161.53,3495 ccw(c4220.74,3495) 4178.87,3453.13 ; 4178.87,3453.13 ccw(c4137,3411.26) 4137,3470.47 cw(c4137,3411.26) 4178.87,3453.13
P4_29: P4.8 U1.85 | length 615.3
  Top Layer w10: U1.85@3996.01,3078.74 3996.01,3202.01 4137,3343 ; P4.8@4137,3395 4137,3343 ; 4137,3343 cw(c4179.85,3343) 4152.6,3376.07 ccw(c4179.85,3343) 4137,3343 ; 4137,3343 ccw(c4094.15,3343) 4121.4,3376.07 cw(c4094.15,3343) 4137,3343 ; 4137,3364.2 cw(c4162.38,3364.2) 4146.24,3383.79 ccw(c4162.38,3364.2) 4137,3364.2 ; 4137,3364.2 ccw(c4111.62,3364.2) 4127.76,3383.79 cw(c4111.62,3364.2) 4137,3364.2
RTCK: P4.21 U1.100 | length 1229.9
  Top Layer w10: P4.21@3431.43,3481.58 cw(c3422.65,3460.46) 3445.35,3463.28 ; P4.21@3434.22,3491.43 cw(c3398.06,3445.01) 3456.46,3452.27 ; P4.21@3439,3495 3439,3463 3487,3415 ; P4.21@3440.36,3499.32 cw(c3398.78,3445.92) 3465.94,3454.28 ; P4.21@3446.51,3507.21 cw(c3419.76,3472.86) 3462.96,3478.23 ; U1.100@3700.74,3078.74 3700.74,3125.26 3487,3339 3487,3415 ; 3439,3462.94 cw(c3448.55,3462.94) 3445.31,3471.92 ccw(c3448.55,3462.94) 3439,3462.94 ; 3439,3462.94 ccw(c3430.89,3462.94) 3432.41,3470.91 cw(c3430.89,3462.94) 3439,3462.94 ; 3487,3415 cw(c3551.14,3479.14) 3461.29,3491.62 ccw(c3551.14,3479.14) 3487,3415 ; P4.21@3431.58,3495.75 ccw(c3476.28,3489.54) 3444.37,3457.63 cw(c3476.28,3489.54) P4.21@3431.58,3495.75 ; P4.21@3441.48,3494.38 ccw(c3501.23,3486.07) 3458.58,3443.42 cw(c3501.23,3486.07) P4.21@3441.48,3494.38 ; P4.21@3451.39,3493 ccw(c3526.18,3482.61) 3472.79,3429.21 cw(c3526.18,3482.61) P4.21@3451.39,3493
RTCK1: C13.2 U1.16 Y2.2 | length 2275.2
  Top Layer w10: C13.2@2643.5,2871.67 ccw(c2657.38,2884.79) 2667.82,2868.8 ; C13.2@2645.93,2872 2666.93,2893 Y2.2@2788,2893 2871,2976 3153,2976 3352,2777 3505,2777 3577.28,2704.72 U1.16@3622,2704.72 ; C13.2@2649.26,2879.73 ccw(c2659.01,2896.61) 2668.75,2879.73 ; C13.2@2650.76,2878.54 ccw(c2666.21,2893.15) 2677.84,2875.35 ; C13.2@2650.96,2889.85 ccw(c2658.38,2913.3) 2670.68,2891.99 ccw(c2678.99,2877.61) C13.2@2662.48,2875.79 ; C13.2@2654.26,2888.39 ccw(c2669.01,2913.91) 2683.75,2888.38 ; C13.2@2658.03,2885.41 ccw(c2675.05,2901.5) 2687.86,2881.89 ; C13.2@2662.02,2869.66 cw(c2679.66,2864.93) 2670.52,2880.75 ; Y2.2@2783.08,2894.18 cw(c2810.13,2890.61) 2803.07,2916.97 ; Y2.2@2791.74,2893.96 ccw(c2780.76,2934.34) 2821.17,2923.51 ; Y2.2@2794.36,2884.32 ccw(c2786.04,2914.92) 2816.67,2906.71 ; 2733.3,2893 cw(c2733.3,2842.3) 2769.15,2878.15 ccw(c2733.3,2842.3) 2733.3,2893 ; 2733.3,2893 ccw(c2733.3,2943.7) 2769.15,2907.85 cw(c2733.3,2943.7) 2733.3,2893 ; 2757.44,2893 cw(c2757.44,2866.44) 2776.22,2885.22 ccw(c2757.44,2866.44) 2757.44,2893 ; 2757.44,2893 ccw(c2757.44,2919.56) 2776.22,2900.78 cw(c2757.44,2919.56) 2757.44,2893 ; C13.2@2643.56,2876.33 cw(c2683.8,2836.1) 2683.8,2893 ccw(c2683.8,2836.1) C13.2@2643.56,2876.33 ; C13.2@2650.63,2869.26 cw(c2707.94,2811.96) 2707.94,2893 ccw(c2707.94,2811.96) C13.2@2650.63,2869.26 ; C13.2@2657.7,2862.19 cw(c2732.08,2787.82) 2732.08,2893 ccw(c2732.08,2787.82) C13.2@2657.7,2862.19 ; Y2.2@2792,2914 ccw(c2792,2955.04) 2821.02,2926.02 cw(c2792,2955.04) Y2.2@2792,2914 ; Y2.2@2803,2893 cw(c2839.21,2893) 2813.61,2918.61 ccw(c2839.21,2893) Y2.2@2803,2893 ; Y2.2@2813,2893 cw(c2873.36,2893) 2830.68,2935.68 ccw(c2873.36,2893) Y2.2@2813,2893
RTCK2: C14.2 U1.18 Y2.1 | length 2020.8
  Top Layer w10: C14.2@2652.93,2793 v1(2788,2793) ; v1(2792,2693) 2819.64,2665.36 U1.18@3622,2665.36 ; v1@2792.06,2685.5 cw(c2792.2,2667.88) 2804.81,2680.19 ; v1@2792.19,2685.5 cw(c2792.61,2668.88) 2804.51,2680.5 cw(c2816.12,2692.39) v1@2799.5,2692.81 ; v1@2799.5,2692.94 ccw(c2817.12,2692.8) 2804.81,2680.19 ; 2733.3,2793 cw(c2733.3,2742.3) 2769.15,2778.15 ccw(c2733.3,2742.3) 2733.3,2793 ; 2733.3,2793 ccw(c2733.3,2843.7) 2769.15,2807.85 cw(c2733.3,2843.7) 2733.3,2793 ; 2757.44,2793 cw(c2757.44,2766.44) 2776.22,2785.22 ccw(c2757.44,2766.44) 2757.44,2793 ; 2757.44,2793 ccw(c2757.44,2819.56) 2776.22,2800.78 cw(c2757.44,2819.56) 2757.44,2793 ; Y2.1@2769.89,2793 cw(c2769.89,2774.89) 2782.7,2787.7 ccw(c2769.89,2774.89) Y2.1@2769.89,2793 ; Y2.1@2769.89,2793 ccw(c2769.89,2811.11) 2782.7,2798.3 cw(c2769.89,2811.11) Y2.1@2769.89,2793 ; 2804.44,2680.56 cw(c2816.88,2692.71) 2799.5,2692.91 ccw(c2816.88,2692.71) 2804.44,2680.56 ; 2804.44,2680.56 ccw(c2792.29,2668.12) 2792.09,2685.5 cw(c2792.29,2668.12) 2804.44,2680.56 ; 2804.8,2680.2 cw(c2817.61,2693) 2799.5,2693 ccw(c2817.61,2693) 2804.8,2680.2 ; 2804.8,2680.2 ccw(c2792,2667.39) 2792,2685.5 cw(c2792,2667.39) 2804.8,2680.2 ; C14.2@2660.7,2779.19 cw(c2694.04,2745.86) 2694.04,2793 ccw(c2694.04,2745.86) C14.2@2660.7,2779.19 ; C14.2@2660.7,2802.74 ccw(c2684.23,2826.27) 2684.23,2793 cw(c2684.23,2826.27) C14.2@2660.7,2802.74
  Bottom Layer w10: v1(2788,2793) 2788,2697 v1(2792,2693) ; 2788,2742.3 cw(c2838.7,2742.3) 2802.85,2778.15 ccw(c2838.7,2742.3) 2788,2742.3 ; 2788,2742.3 ccw(c2737.3,2742.3) 2773.15,2778.15 cw(c2737.3,2742.3) 2788,2742.3 ; 2788,2766.44 cw(c2814.56,2766.44) 2795.78,2785.22 ccw(c2814.56,2766.44) 2788,2766.44 ; 2788,2766.44 ccw(c2761.44,2766.44) 2780.22,2785.22 cw(c2761.44,2766.44) 2788,2766.44 ; Y2.1@2788,2774.89 cw(c2806.11,2774.89) 2793.3,2787.7 ccw(c2806.11,2774.89) Y2.1@2788,2774.89 ; Y2.1@2788,2774.89 ccw(c2769.89,2774.89) 2782.7,2787.7 cw(c2769.89,2774.89) Y2.1@2788,2774.89 ; 2788,2720.76 ccw(c2819.76,2720.76) 2797.3,2698.3 cw(c2819.76,2720.76) 2788,2720.76
SWDCLK: P0.3 P1.5 U1.5 | length 2806.8
  Top Layer w10: P0.3@1986,3021 2181,3021 P1.5@2182,3020 2232,3070 2306,3070 2444,3208 3189,3208 3475.74,2921.26 U1.5@3622,2921.26 ; P1.5@2176.64,3021.1 cw(c2214.3,3013.39) 2204.35,3050.52 ; P1.5@2183.1,3014.64 ccw(c2175.39,3052.3) 2212.52,3042.35 ; 2021.07,3021 cw(c2021.07,3056.07) 1996.27,3031.27 ccw(c2021.07,3056.07) 2021.07,3021 ; 2021.07,3021 ccw(c2021.07,2985.93) 1996.27,3010.73 cw(c2021.07,2985.93) 2021.07,3021 ; 2045.21,3021 cw(c2045.21,3080.21) 2003.34,3038.34 ccw(c2045.21,3080.21) 2045.21,3021 ; 2045.21,3021 ccw(c2045.21,2961.79) 2003.34,3003.66 cw(c2045.21,2961.79) 2045.21,3021 ; 2206.8,3044.8 cw(c2182,3069.6) 2182,3034.53 ccw(c2182,3069.6) 2206.8,3044.8 ; 2206.8,3044.8 ccw(c2231.6,3020) 2196.53,3020 cw(c2231.6,3020) 2206.8,3044.8 ; 2223.87,3061.87 cw(c2182,3103.74) 2182,3044.53 ccw(c2182,3103.74) 2223.87,3061.87 ; 2223.87,3061.87 ccw(c2265.74,3020) 2206.53,3020 cw(c2265.74,3020) 2223.87,3061.87 ; 2120.37,3021 cw(c2120.37,2958.37) 2164.66,3002.66 ccw(c2120.37,2958.37) 2120.37,3021 ; 2125.2,3021 ccw(c2125.2,3076.8) 2164.66,3037.34 cw(c2125.2,3076.8) 2125.2,3021 ; 2144.51,3021 cw(c2144.51,2982.51) 2171.73,3009.73 ccw(c2144.51,2982.51) 2144.51,3021 ; 2149.34,3021 ccw(c2149.34,3052.66) 2171.73,3030.27 cw(c2149.34,3052.66) 2149.34,3021
SWDIO: P0.2 P1.3 U1.3 | length 2796.3
  Top Layer w10: P0.2@1986,3121 2181,3121 P1.3@2182,3120 2229,3167 2294,3167 2392,3265 3223,3265 3527.37,2960.63 U1.3@3622,2960.63 ; P1.3@2176.64,3121.1 cw(c2214.3,3113.39) 2204.35,3150.52 ; P1.3@2183.1,3114.64 ccw(c2175.39,3152.3) 2212.52,3142.35 ; 2021.07,3121 cw(c2021.07,3156.07) 1996.27,3131.27 ccw(c2021.07,3156.07) 2021.07,3121 ; 2021.07,3121 ccw(c2021.07,3085.93) 1996.27,3110.73 cw(c2021.07,3085.93) 2021.07,3121 ; 2045.21,3121 cw(c2045.21,3180.21) 2003.34,3138.34 ccw(c2045.21,3180.21) 2045.21,3121 ; 2045.21,3121 ccw(c2045.21,3061.79) 2003.34,3103.66 cw(c2045.21,3061.79) 2045.21,3121 ; 2206.8,3144.8 cw(c2182,3169.6) 2182,3134.53 ccw(c2182,3169.6) 2206.8,3144.8 ; 2206.8,3144.8 ccw(c2231.6,3120) 2196.53,3120 cw(c2231.6,3120) 2206.8,3144.8 ; 2223.87,3161.87 cw(c2182,3203.74) 2182,3144.53 ccw(c2182,3203.74) 2223.87,3161.87 ; 2223.87,3161.87 ccw(c2265.74,3120) 2206.53,3120 cw(c2265.74,3120) 2223.87,3161.87 ; 2120.37,3121 cw(c2120.37,3058.37) 2164.66,3102.66 ccw(c2120.37,3058.37) 2120.37,3121 ; 2125.2,3121 ccw(c2125.2,3176.8) 2164.66,3137.34 cw(c2125.2,3176.8) 2125.2,3121 ; 2144.51,3121 cw(c2144.51,3082.51) 2171.73,3109.73 ccw(c2144.51,3082.51) 2144.51,3121 ; 2149.34,3121 ccw(c2149.34,3152.66) 2171.73,3130.27 cw(c2149.34,3152.66) 2149.34,3121
TDI: P1.2 U1.2 | length 1876.9
  Top Layer w10: P1.2@2276.64,3221.1 cw(c2314.3,3213.39) 2304.35,3250.52 ; P1.2@2282,3220 2350,3288 3242,3288 3549.68,2980.32 U1.2@3622,2980.32 ; P1.2@2283.1,3214.64 ccw(c2275.39,3252.3) 2312.52,3242.35 ; 2306.8,3244.8 cw(c2282,3269.6) 2282,3234.53 ccw(c2282,3269.6) 2306.8,3244.8 ; 2306.8,3244.8 ccw(c2331.6,3220) 2296.53,3220 cw(c2331.6,3220) 2306.8,3244.8 ; 2323.87,3261.87 cw(c2282,3303.74) 2282,3244.53 ccw(c2282,3303.74) 2323.87,3261.87 ; 2323.87,3261.87 ccw(c2365.74,3220) 2306.53,3220 cw(c2365.74,3220) 2323.87,3261.87
TDO: P1.1 U1.1 | length 1939.1
  Top Layer w10: P1.1@2182,3220 2182,3278 ; U1.1@3622,3000 3571,3000 3246,3325 2229,3325 2182,3278 ; 2182,3254.35 cw(c2148.65,3254.35) 2171.88,3230.42 ccw(c2148.65,3254.35) 2182,3254.35 ; 2182,3254.35 ccw(c2215.35,3254.35) 2192.12,3230.42 cw(c2215.35,3254.35) 2182,3254.35 ; 2182,3278 cw(c2125.69,3278) 2164.92,3237.6 ccw(c2125.69,3278) 2182,3278 ; 2182,3278 ccw(c2238.31,3278) 2199.08,3237.6 cw(c2238.31,3278) 2182,3278
TRST: P1.4 U1.4 | length 1889.9
  Top Layer w10: P1.4@2276.64,3121.1 cw(c2314.3,3113.39) 2304.35,3150.52 ; P1.4@2282,3120 2396,3234 3213,3234 3506.05,2940.95 U1.4@3622,2940.95 ; P1.4@2283.1,3114.64 ccw(c2275.39,3152.3) 2312.52,3142.35 ; 2306.8,3144.8 cw(c2282,3169.6) 2282,3134.53 ccw(c2282,3169.6) 2306.8,3144.8 ; 2306.8,3144.8 ccw(c2331.6,3120) 2296.53,3120 cw(c2331.6,3120) 2306.8,3144.8 ; 2323.87,3161.87 cw(c2282,3203.74) 2282,3144.53 ccw(c2282,3203.74) 2323.87,3161.87 ; 2323.87,3161.87 ccw(c2365.74,3120) 2306.53,3120 cw(c2365.74,3120) 2323.87,3161.87
VA3.3: C8.1 C9.1 U1.10 | length 1442.2
  Top Layer w10: U1.10@3622,2822.84 3668.84,2822.84 3704,2858 3787,2858 3814,2831 v1(3814,2810) ; 3814,2828.11 cw(c3795.89,2828.11) 3808.7,2815.3 ccw(c3795.89,2828.11) 3814,2828.11 ; 3814,2828.11 ccw(c3832.11,2828.11) 3819.3,2815.3 cw(c3832.11,2828.11) 3814,2828.11
  Bottom Layer w10: C8.1@3301,2824 3671,2824 3704,2857 3789,2857 ; v1(3814,2810) 3814,2832 3789,2857 ; 3340.82,2824 cw(c3340.82,2863.82) 3312.66,2835.66 ccw(c3340.82,2863.82) 3340.82,2824 ; 3340.82,2824 ccw(c3340.82,2784.18) 3312.66,2812.34 cw(c3340.82,2784.18) 3340.82,2824 ; 3364.97,2824 cw(c3364.97,2887.97) 3319.74,2842.74 ccw(c3364.97,2887.97) 3364.97,2824 ; 3364.97,2824 ccw(c3364.97,2760.03) 3319.74,2805.26 cw(c3364.97,2760.03) 3364.97,2824 ; 3789,2857 cw(c3761.75,2829.75) 3798.23,2817.33 ccw(c3761.75,2829.75) 3789,2857 ; C9.1@3814,2828.11 cw(c3795.89,2828.11) 3808.7,2815.3 ccw(c3795.89,2828.11) C9.1@3814,2828.11 ; C9.1@3814,2828.11 ccw(c3832.11,2828.11) 3819.3,2815.3 cw(c3832.11,2828.11) C9.1@3814,2828.11 ; 3800.36,2845.64 cw(c3778.71,2823.98) 3807.7,2814.11 ccw(c3778.71,2823.98) 3800.36,2845.64 ; 3811.72,2834.28 cw(c3795.66,2818.21) 3817.17,2810.89 ccw(c3795.66,2818.21) 3811.72,2834.28